# Altium PCB simple.PcbDoc (part 1 of 2)
Units mil, origin at the board's own origin, x right, y up, seen from the top; angles counter-clockwise.
Board outline 3675.59 x 3445.28 mil, 2 copper layers (Top Layer, Bottom Layer); 234 components, 188 nets, 815 pads, 280 vias.
Unrouted connection lines stored in the file: 1.
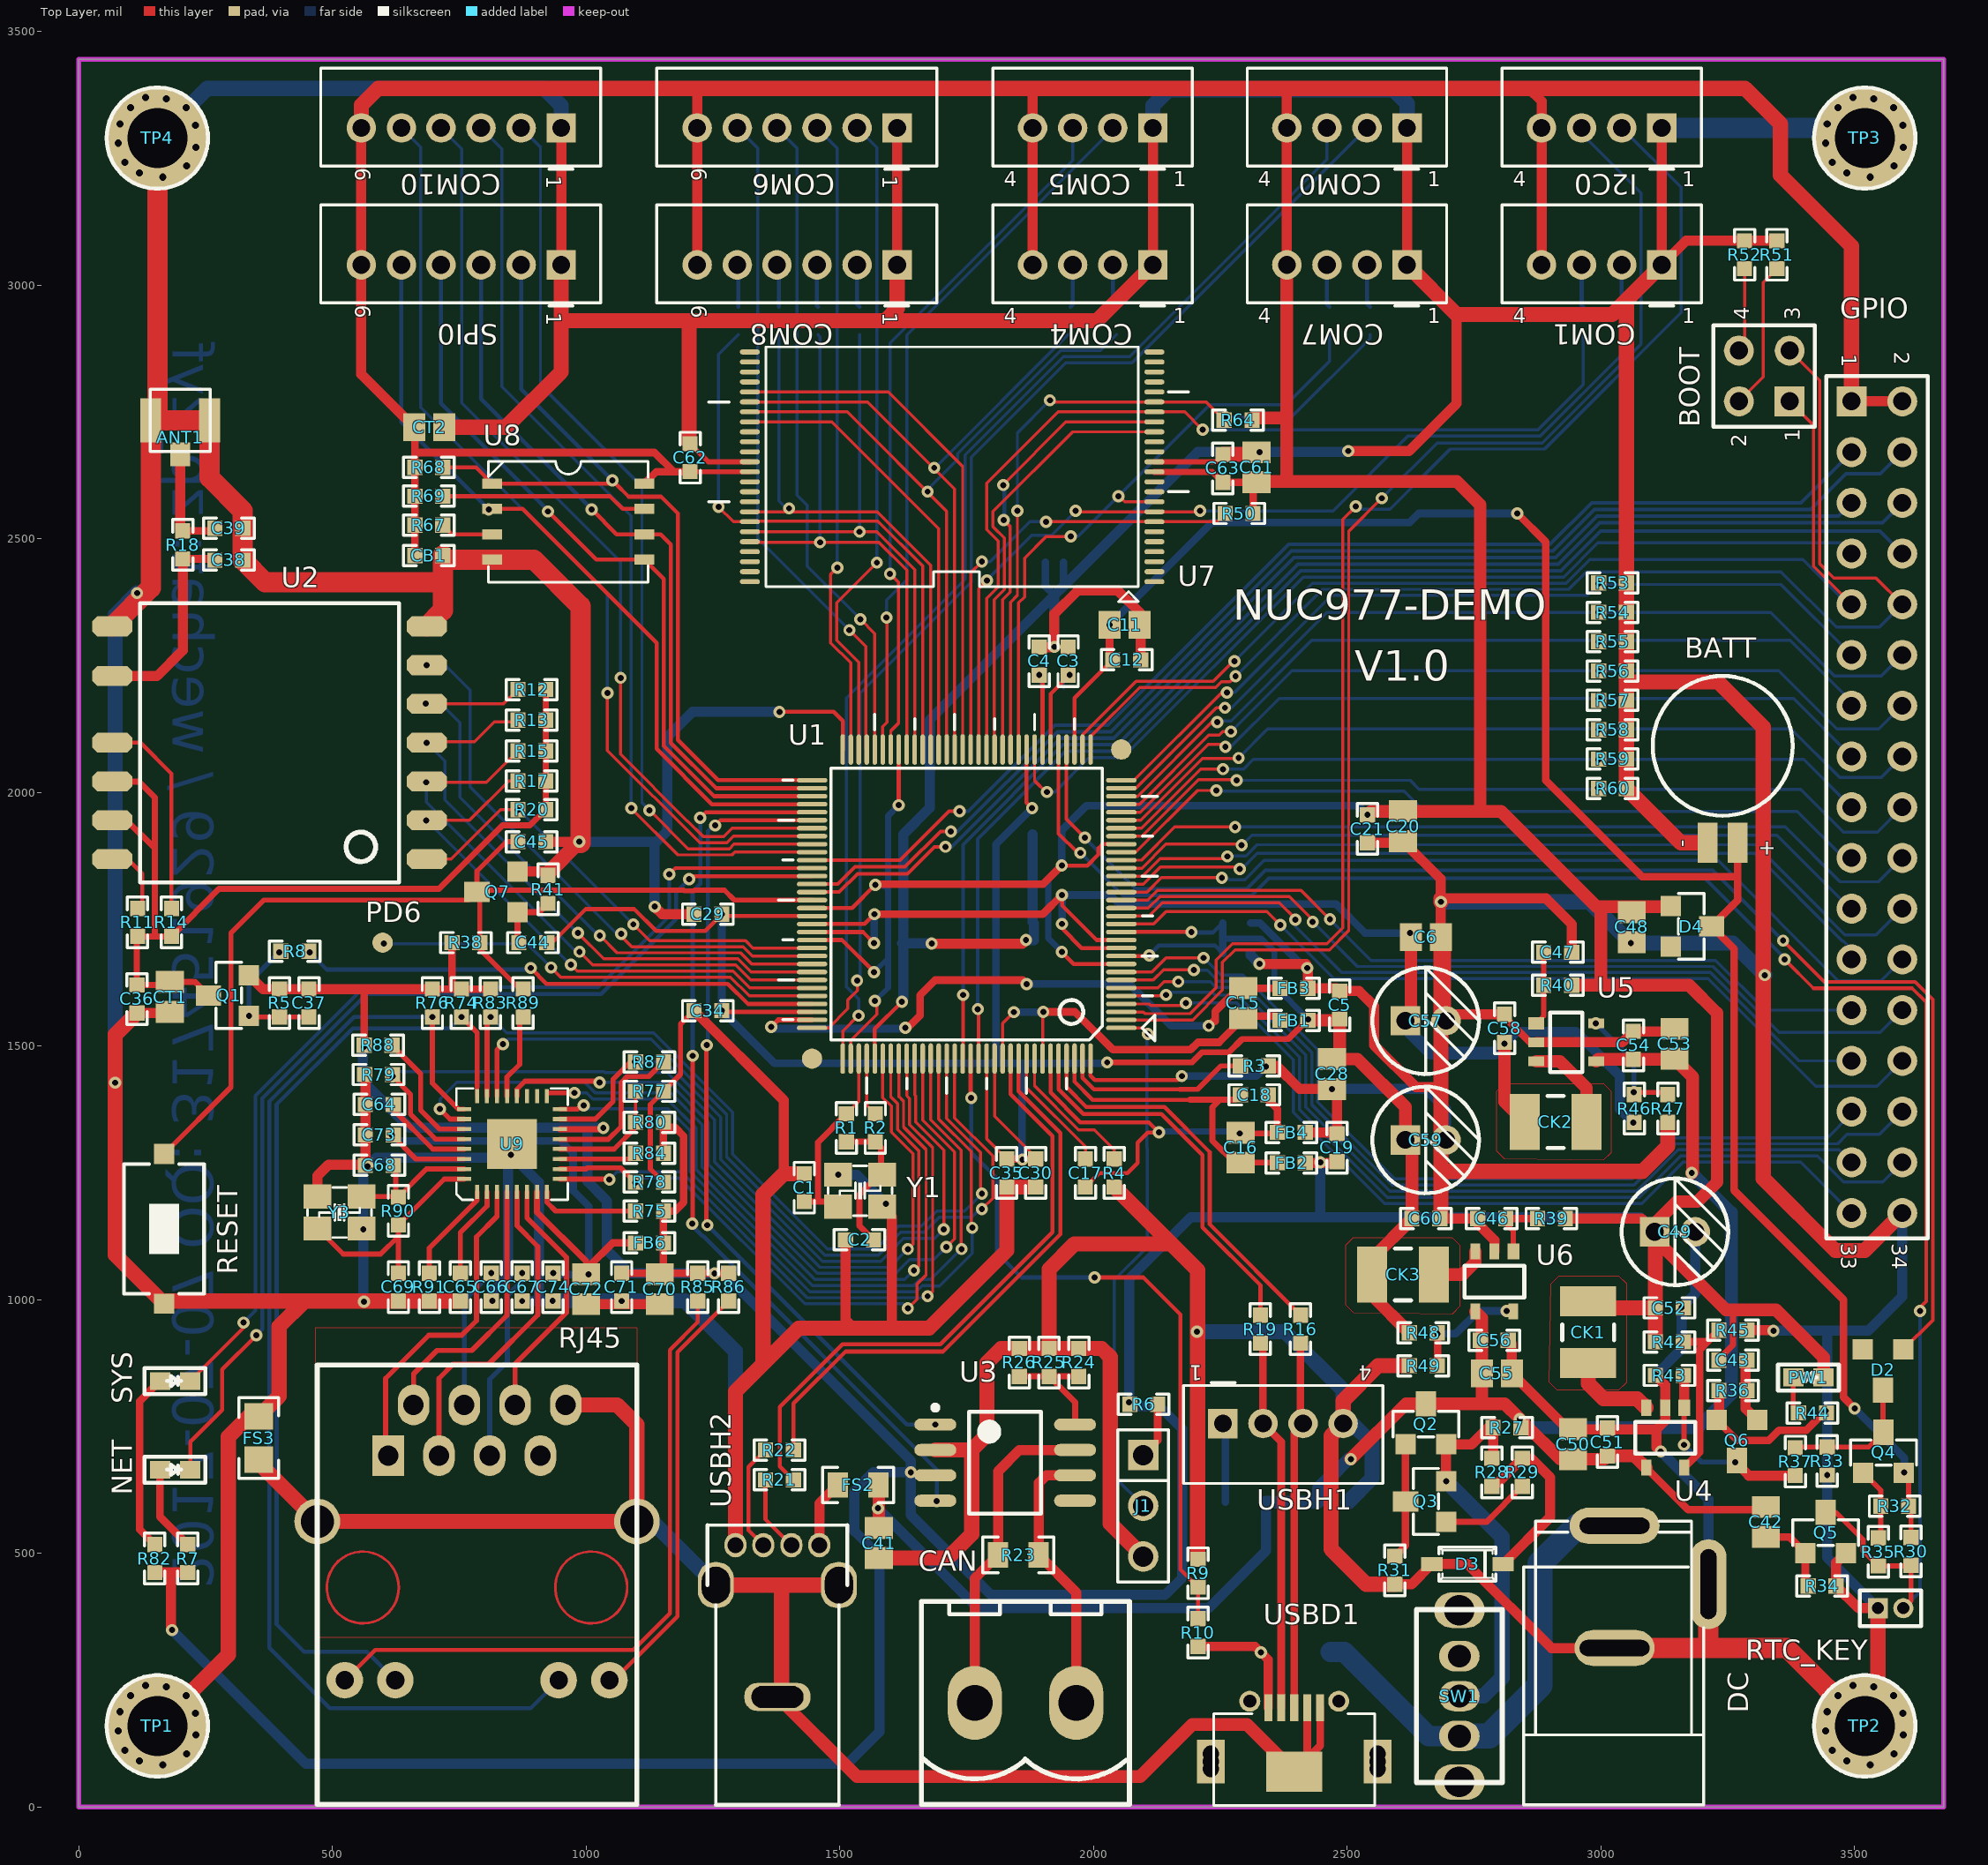
[diagram p0: Top Layer view]
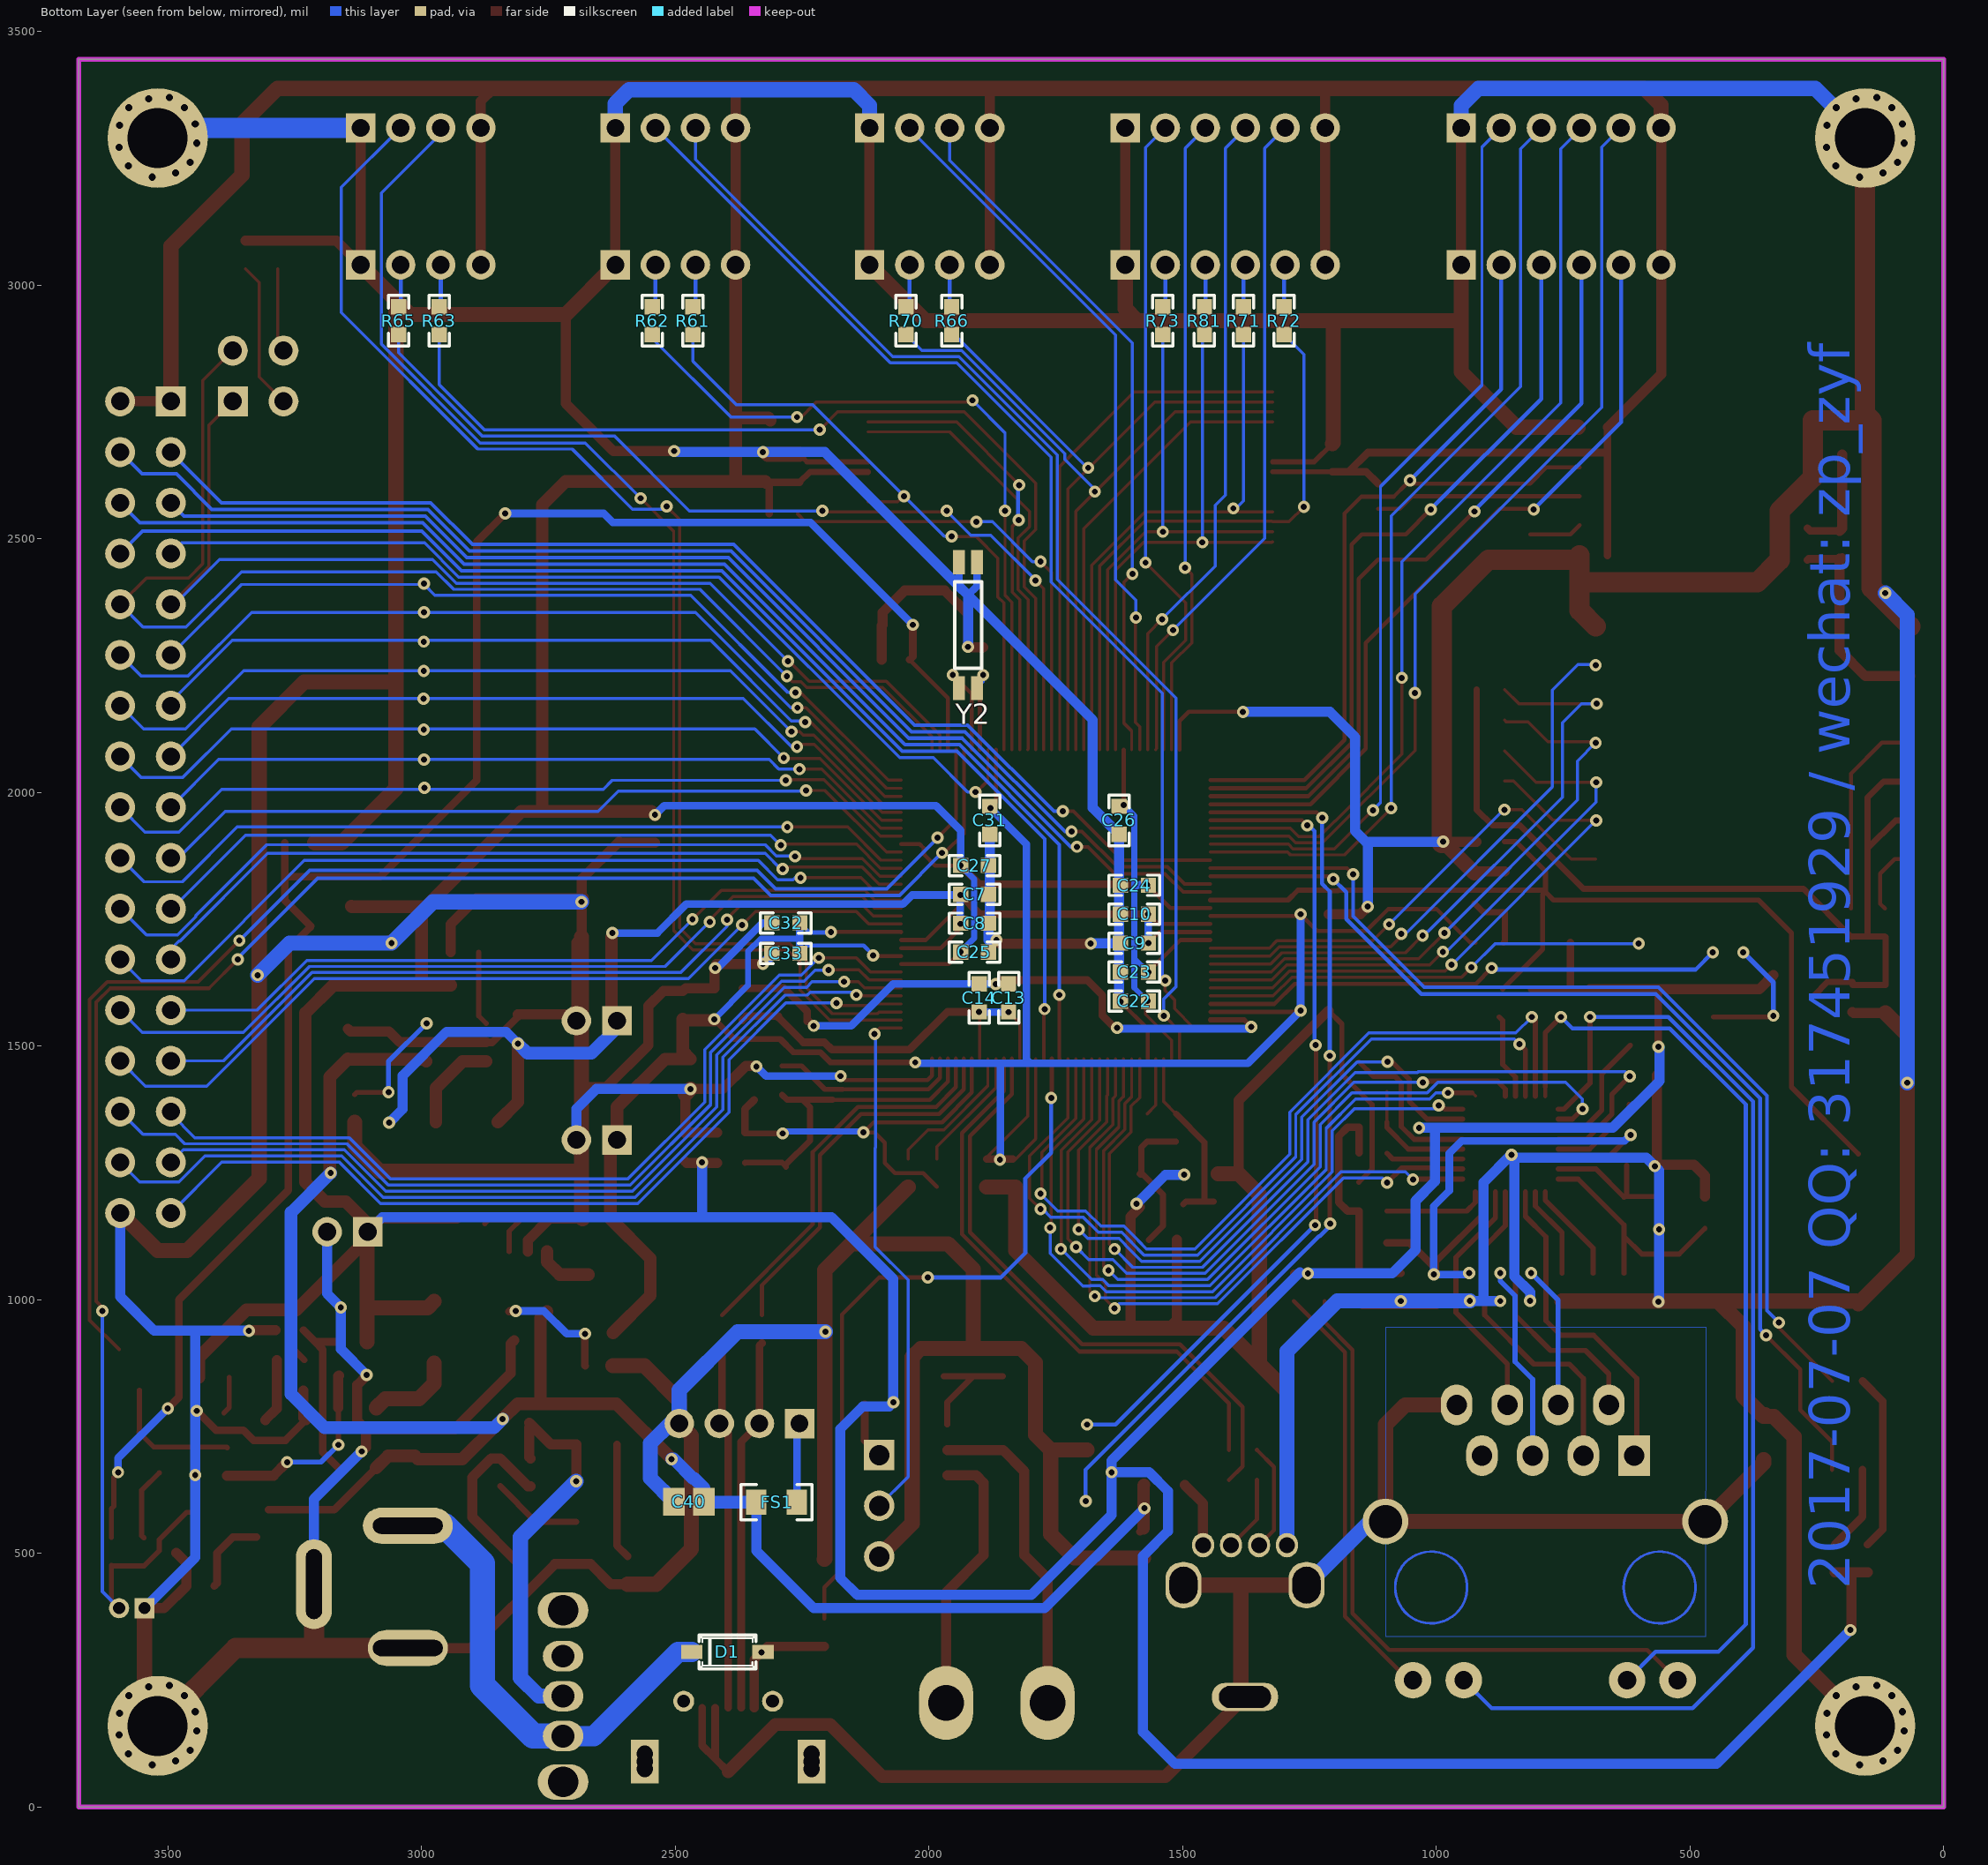
[diagram p1: Bottom Layer view, seen from below]

## Layer stack, top to bottom
Top Solder: solder mask 0.4, Solder Resist, Dk 3.5
Top Layer: signal copper 1.4
Dielectric 1: dielectric 12.6, FR-4, Dk 4.8
Bottom Layer: signal copper 1.4
Bottom Solder: solder mask 0.4, Solder Resist, Dk 3.5

## Board outline
0,0 0,3445.28 3675.59,3445.28 3675.59,0

## Design rules (kind name [scope] priority, off if disabled: settings)
Clearance [All] p1: gap=6
PolygonConnect [All] p1: connectstyle=Relief reliefconductorwidth=10 reliefentries=4 polygonreliefangle="90 Angle" airgapwidth=10
RoutingVias [All] p1: holewidth=12 width=24 viastyle="Through Hole" minholewidth=12 minwidth=24 maxholewidth=28 maxwidth=50
SolderMaskExpansion [All] p1: expansion=4
Width [All] p1: maxlimit=50 minlimit=6 preferedwidth=8
30 further rules are at their usual default settings.

## Classes and differential pairs
component class configure: BOOT R51 R52 R53 R54 R55 R56 R57 R58 R59 R60
component class flash: C61 C62 C63 CB1 CT2 R50 R64 R67 R68 R69 U7 U8
component class interface: ANT1 C36 C37 C38 C39 C40 C41 CAN COM0 COM1 COM4 COM5 COM6 COM7 COM8 COM10 CT1 D1 FS1 FS2 FS3 I2C0 J1 PD6 Q1 R5 R6 R8 R9 R10 R11 R12 R13 R14 R15 R16 R17 R18 R19 R20 R21 R22 R23 R24 R25 R26 SPI0 TP1 TP2 TP3 TP4 U2 U3 USBD1 USBH1 USBH2
component class nuc977: C1 C2 C3 C4 C5 C6 C7 C8 C9 C10 C11 C12 C13 C14 C15 C16 C17 C18 C19 C20 C21 C22 C23 C24 C25 C26 C27 C28 C29 C30 C31 C32 C33 C34 C35 FB1 FB2 FB3 FB4 GPIO NET R1 R2 R3 R4 R7 R61 R62 R63 R65 R66 R70 R71 R72 R73 R81 R82 SYS U1 Y1 Y2
component class power: BATT C42 C43 C44 C45 C46 C47 C48 C49 C50 C51 C52 C53 C54 C55 C56 C57 C58 C59 C60 CK1 CK2 CK3 D2 D3 D4 DC PW1 Q2 Q3 Q4 Q5 Q6 Q7 R27 R28 R29 R30 R31 R32 R33 R34 R35 R36 R37 R38 R39 R40 R41 R42 R43 R44 R45 R46 R47 R48 R49 RESET RTC_KEY SW1 U4 U5 U6
component class RMII: C64 C65 C66 C67 C68 C69 C70 C71 C72 C73 C74 FB6 R74 R75 R76 R77 R78 R79 R80 R83 R84 R85 R86 R87 R88 R89 R90 R91 RJ45 U9 Y3
net class PA[0..9]: PA0 PA1 PA2 PA3 PA4 PA5 PA6 PA7 PA8 PA9 PA10 PA11 PA12 PA13 PA14 PA15
net class PB[6..9]: PB0 PB1 PB2 PB3 PB4 PB5 PB6 PB7 PB8 PB9 PB10 PB11 PB12 PB13 PB14 PB15
net class PI[1..15]: PI1 PI2 PI3 PI4 PI5 PI6 PI7 PI8 PI9 PI10 PI11 PI12 PI13 PI14 PI15
net class PD[0..7]: PD0 PD1 PD2 PD3 PD4 PD5 PD6 PD7

## Components (designator, comment, footprint, x,y, rotation, side; value= is the part's Value field where it differs from the comment)
ANT1 "IPEX-SOCKET/SMA" ANT_PIX 200,2700 r0 top
BATT "BATTERY" MS621 3240,1901 r270 top
BOOT "Header 2X2" HDR2X2 3372,2771 r90 top
C1 "27pF" 0603C 1430,1221 r90 top
C2 "27pF" 0603C 1539,1118 r180 top
C3 "27pF" 0603C 1950,2259 r90 top
C4 "27pF" 0603C 1893,2259 r90 top
C5 "104/SMD0603" 0603C 2485,1580.91 r90 top
C6 "22Uf/SMD0805" C0805 2655,1715 r0 top
C7 "104/SMD0603" 0603C 1910,1799 r180 bottom
C8 "104/SMD0603" 0603C 1910,1742.25 r180 bottom
C9 "104/SMD0603" 0603C 1595,1703 r0 bottom
C10 "104/SMD0603" 0603C 1595,1760 r0 bottom
C11 "10uF/SMD0805" C0805 2061.31,2330.5 r0 top
C12 "104/SMD0603" 0603C 2065.4,2261.5 r0 top
C13 "104/SMD0603" 0603C 1842.87,1595 r90 bottom
C14 "104/SMD0603" 0603C 1901,1595 r90 bottom
C15 "22Uf/SMD0805" C0805 2295,1585 r90 top
C16 "22uF/SMD1206" C0805 2290,1300 r90 top
C17 "104/SMD0603" 0603C 1984,1250 r270 top
C18 "104/SMD0603" 0603C 2317,1404 r0 top
C19 "104/SMD0603" 0603C 2480,1300 r90 top
C20 "22Uf/SMD0805" C0805 2610,1933.31 r270 top
C21 "102/SMD0603" 0603C 2540,1928.31 r270 top
C22 "104/SMD0603" 0603C 1595,1589 r0 bottom
C23 "104/SMD0603" 0603C 1595,1646 r0 bottom
C24 "104/SMD0603" 0603C 1595,1817 r0 bottom
C25 "104/SMD0603" 0603C 1910,1685.5 r180 bottom
C26 "104/SMD0603" 0603C 1625,1945 r270 bottom
C27 "104/SMD0603" 0603C 1910,1856 r180 bottom
C28 "22Uf/SMD0805" C0805 2470,1445 r270 top
C29 "104/SMD0603" 0603C 1240,1760 r180 top
C30 "104/SMD0603" 0603C 1886,1250 r270 top
C31 "104/SMD0603" 0603C 1880,1945 r270 bottom
C32 "104/SMD0603" 0603C 2282,1743 r0 bottom
C33 "104/SMD0603" 0603C 2282,1683 r0 bottom
C34 "104/SMD0603" 0603C 1240,1570 r180 top
C35 "104/SMD0603" 0603C 1829,1250 r270 top
C36 "104/SMD0603" 0603C 114.68,1592.91 r90 top
C37 "104/SMD0603" 0603C 453.68,1585 r90 top
C38 "NC" 0603C 296,2458 r180 top
C39 "NC" 0603C 296,2521 r180 top
C40 "22uF/SMD1206" C0805 2473,602 r0 bottom
C41 "22uF/SMD1206" C0805 1577,520.47 r90 top
C42 "1uF/SMD0805" C0805 3325,562 r270 top
C43 "104/SMD0603" 0603C 3260,881 r0 top
C44 "1uF" 0603C 895,1704 r180 top
C45 "1uF" 0603C 893,1903 r0 top
C46 "103/SMD0603" 0603C 2785,1160 r0 top
C47 "103/SMD0603" 0603C 2915,1685 r180 top
C48 "10uF/SMD0805" C0805 3061,1734.53 r270 top
C49 "FP-6R3RE271M-F8" 6R3RE271M 3146,1134 r90 top
C50 "10uF/SMD0805" C0805 2945,715.34 r90 top
C51 "104/SMD0603" 0603C 3013,719.5 r270 top
C52 "104/SMD0603" 0603C 3135,984 r180 top
C53 "10uF/SMD0805" C0805 3145,1504.53 r90 top
C54 "104/SMD0603" 0603C 3064,1501.53 r270 top
C55 "10uF/SMD0805" C0805 2795,855 r0 top
C56 "104/SMD0603" 0603C 2790,920 r180 top
C57 "FP-6R3RE271M-F8" 6R3RE271M 2654.69,1550 r90 top
C58 "104" 0603C 2810,1535 r270 top
C59 "FP-6R3RE271M-F8" 6R3RE271M 2654.69,1315 r90 top
C60 "104" 0603C 2655,1160 r180 top
C61 "10uF" C0805 2321.32,2641 r270 top
C62 "104/SMD0603" 0603C 1205,2660 r270 top
C63 "104/SMD0603" 0603C 2255,2639 r270 top
C64 "105/SMD0603" 0603C 592.5,1385 r180 top
C65 "105/SMD0603" 0603C 752,1025 r270 top
C66 "222/SMD0603" 0603C 813,1025 r270 top
C67 "222/SMD0603" 0603C 874,1025 r270 top
C68 "27pF" 0603C 592.5,1265 r0 top
C69 "27pF" 0603C 630,1025 r90 top
C70 "10uF/SMD0805" C0805 1145,1020.91 r270 top
C71 "104/SMD0603" 0603C 1070,1025 r270 top
C72 "10uF/SMD0805" C0805 1000,1020.91 r270 top
C73 "104/SMD0603" 0603C 592.5,1325 r180 top
C74 "104/SMD0603" 0603C 935,1025 r270 top
CAN "CON2" INTERFACE-2 1866,205.51 r180 top
CB1 "0.1uF" 0603C 690,2467 r180 top
CK1 "2.2uH/1.85A/SWPA4020S2R2NT" C1210_M 2975,936 r90 top
CK2 "2.2uH/CD42-2R2M" C1210_M 2910.69,1350.53 r180 top
CK3 "2.2uH/CD42-2R2M" C1210_M 2610,1050 r180 top
COM0 "Header 4" PH04S_180 2499.5,3310 r270 top
COM1 "Header 4" PH04S_180 3001.5,3040 r270 top
COM4 "Header 4" PH04S_180 1998.5,3040 r270 top
COM5 "Header 4" PH04S_180 1998.5,3310 r270 top
COM6 "Header 6H" PH06S 1416,3310 r270 top
COM7 "Header 4" PH04S_180 2499.5,3040 r270 top
COM8 "Header 6H" PH06S 1416,3040 r270 top
COM10 "Header 6H" PH06S 754,3310 r270 top
CT1 "10uF" C0805 179.68,1597 r90 top
CT2 "10uF" C0805 691,2720 r0 top
D1 "1N5819S" SOD-123_1N5819HW 2397,306 r180 bottom
D2 "HBAT54/SOT-23" SOT-23_HBAT54 3556,877 r0 top
D3 "5.1V" SOD-123_1N5819HW 2737,479 r180 top
D4 "BAT54" BAT54 3178,1736 r270 top
DC "DC-10B" DC-JACK 3026,313.59 r270 top
FB1 "150R/800mA/SMD0603" 0603R 2395,1550.91 r0 top
FB2 "150R/800mA/SMD0603" 0603R 2390,1270 r180 top
FB3 "150R/800mA/SMD0603" 0603R 2395,1614.09 r0 top
FB4 "150R/800mA/SMD0603" 0603R 2390,1330 r180 top
FB6 "150R/800mA/SMD0603" 0603R 1125,1112 r0 top
FS1 "500mA" 0805 2300,601 r90 bottom
FS2 "500mA" 0805 1536,635 r270 top
FS3 "500mA" 0805R 355,770 r270 top
GPIO "Header 17X2" HDR2X17 3494,2771 r270 top
I2C0 "Header 4" PH04S_180 3001.5,3310 r270 top
J1 "Device / HOST" SIP3 2098,694 r270 top
NET "blue" LED-0603 190,665 r180 top
PD6 "TP" TP 598.88,1703.64 r90 top
PW1 "red" LED-0603 3409,847 r0 top
Q1 "AP2305N/SOT-23" AP2305N_SOT23 295.68,1600 r90 top
Q2 "AP2305N/SOT-23" AP2305N_SOT23 2655,755 r0 top
Q3 "AP2305N/SOT-23" AP2305N_SOT23 2655,602.5 r90 top
Q4 "HMBT3906/SOT-23" SOT-23_HMBT3906 3557,699 r180 top
Q5 "2N7002/SOT-23" SOT-23_H2N7002 3443,541 r0 top
Q6 "HMBT3904/SOT-23" SOT-23_HMBT3904 3268,723 r0 top
Q7 "HMBT3904/SOT-23" SOT-23_HMBT3904 825,1804 r270 top
R1 "1M" 0603R 1513,1339 r90 top
R2 "390R" 0603R 1570,1339 r270 top
R3 "12.1K" 0603R 2317,1461 r180 top
R4 "12.1K" 0603R 2041,1250 r90 top
R5 "100K" 0603R 395.68,1585 r270 top
R6 "51K" 0603R 2099,794 r0 top
R7 "2K" 0603C 215,490 r90 top
R8 "10K" 0603R 426,1687 r180 top
R9 "390K" 0603R 2206,461 r90 top
R10 "200K" 0603R 2206,344 r270 top
R11 "10K" 0603R 116,1744 r270 top
R12 "10K" 0603R 893,2203 r180 top
R13 "10K" 0603R 893,2142.5 r180 top
R14 "10K" 0603R 183,1744 r270 top
R15 "10K" 0603R 893,2082 r180 top
R16 "33R/SMD0603" 0603R 2408,942 r270 top
R17 "10K" 0603R 893,2022.5 r180 top
R18 "0R" 0603R 205,2488 r90 top
R19 "33R/SMD0603" 0603R 2329,942 r270 top
R20 "10K" 0603R 893,1966 r180 top
R21 "33R/SMD0603" 0603R 1381,645 r180 top
R22 "33R/SMD0603" 0603R 1381,704 r180 top
R23 "120R" 0805 1852,497 r270 top
R24 "0R" 0603R 1971,876.5 r90 top
R25 "10K" 0603R 1912.5,876.5 r90 top
R26 "100K" 0603R 1854,876.5 r90 top
R27 "0R" 0603C 2815,748 r0 top
R28 "15K" 0603C 2785,660 r270 top
R29 "4K7" 0603C 2845,660 r270 top
R30 "100K/SMD0603" 0603R 3611,504 r90 top
R31 "10K" 0603C 2594,467 r270 top
R32 "100K/SMD0603" 0603R 3579,593 r0 top
R33 "100K/SMD0603" 0603R 3446,682 r270 top
R34 "470K/SMD0603" 0603R 3436,436 r180 top
R35 "47K/SMD0603" 0603R 3547,503 r270 top
R36 "100K/SMD0603" 0603R 3260,821 r180 top
R37 "47K/SMD0603" 0603R 3383,681 r270 top
R38 "100K" 0603R 763,1704 r180 top
R39 "10K/SMD0603" 0603R 2902.5,1160 r0 top
R40 "1K/SMD0603" 0603R 2915,1620 r0 top
R41 "100K" 0603R 925,1809 r270 top
R42 "100K/1%/SMD0603" 0603R 3135,917 r180 top
R43 "ASK/47K/SMD0603" 0603R 3135,851 r180 top
R44 "2K" 0603R 3417,777 r0 top
R45 "22K/1%/SMD0603" 0603R 3260,940 r180 top
R46 "240K" 0603R 3065.69,1377.03 r90 top
R47 "120K" 0603R 3131.69,1377.03 r270 top
R48 "100K" 0603R 2650,935 r0 top
R49 "100K" 0603R 2650,870 r180 top
R50 "10K/SMD0603" 0603R 2287,2550 r0 top
R51 "10K" 0603R 3347,3060 r270 top
R52 "10K" 0603R 3283,3060 r270 top
R53 "10K" 0603R 3023,2413 r180 top
R54 "10K" 0603R 3023,2355.14 r180 top
R55 "10K" 0603R 3023,2297.29 r180 top
R56 "10K" 0603R 3023,2239.43 r180 top
R57 "10K" 0603R 3023,2181.57 r180 top
R58 "10K" 0603R 3023,2123.71 r180 top
R59 "10K" 0603R 3023,2065.86 r180 top
R60 "10K" 0603R 3023,2008 r180 top
R61 "22R" 0603R 2465,2930 r270 bottom
R62 "22R" 0603R 2545,2930 r270 bottom
R63 "22R" 0603R 2965,2930 r270 bottom
R64 "10K/SMD0603" 0603R 2285,2734 r0 top
R65 "22R" 0603R 3045,2930 r270 bottom
R66 "22R" 0603R 1955,2930 r270 bottom
R67 "10K" 0603R 690,2527 r0 top
R68 "10K" 0603R 690,2641 r0 top
R69 "10K" 0603R 690,2584 r0 top
R70 "22R" 0603R 2045,2930 r270 bottom
R71 "22R" 0603R 1380,2930 r270 bottom
R72 "22R" 0603R 1300,2930 r270 bottom
R73 "22R" 0603R 1539,2930 r270 bottom
R74 "4.7K/SMD0603" 0603R 754.33,1585 r270 top
R75 "4.7K/SMD0603" 0603R 1125,1175 r180 top
R76 "4.7K/SMD0603" 0603R 697,1585 r270 top
R77 "DNP/4.7K/SMD0603" 0603R 1125,1411 r180 top
R78 "4.7K/SMD0603" 0603R 1125,1232 r180 top
R79 "4.7K/SMD0603" 0603R 591,1444 r0 top
R80 "DNP/4.7K/SMD0603" 0603R 1125,1350 r180 top
R81 "22R" 0603R 1457,2930 r270 bottom
R82 "2K" 0603C 150,490 r90 top
R83 "4.7K/SMD0603" 0603R 811.67,1585 r270 top
R84 "4.7K/SMD0603" 0603R 1125,1289 r180 top
R85 "510R/SMD0603" 0603R 1220,1025 r90 top
R86 "510R/SMD0603" 0603R 1281,1025 r90 top
R87 "0R" 0603R 1125,1469 r180 top
R88 "10K" 0603C 590,1502 r0 top
R89 "0R" 0603R 876,1585 r90 top
R90 "1M" 0603C 630,1175 r270 top
R91 "2.49K/1%/SMD0603" 0603R 691,1025 r270 top
RESET "SW" SW-PB2 168,1140 r90 top
RJ45 "HR911105A" HR911105A 769,263.91 r270 top
RTC_KEY "JP2" mhdr1x2 3546,392 r0 top
SPI0 "Header 6H" PH06S 754,3040 r270 top
SW1 "" SS-12D07 2721,218.8 r180 top
SYS "blue" LED-0603 190,840 r180 top
TP1 "TEST POINT" HOLE53 155,160 r0 top
TP2 "TEST POINT" HOLE53 3520,160 r0 top
TP3 "TEST POINT" HOLE53 3520,3290 r0 top
TP4 "TEST POINT" HOLE53 155,3290 r0 top
U1 "NUC977" QFP128/16/0.4 1750,1780 r90 top
U2 "RTL8189ES" RTL8189ES 631,2372.73 r180 top
U3 "SN65HVD230" SOIC127P800-8N 1826,679 r0 top
U4 "LC3406CB5TR/SOT23-5" SOT-23-5 3164,787.11 r0 top
U5 "LC3406CB5TR/SOT23-5" SOT-23-5 2872.69,1544.93 r90 top
U6 "LC3406CB5TR/SOT23-5" SOT-23-5 2827.4,1095 r0 top
U7 "S34ML02G100TFI000/TSOP1-48" TSOP48-0.5MM 2127.87,2415.57 r180 top
U8 "W55X16" VDFPN8 965,2534 r0 top
U9 "RTL8201F/QFN-32" QFN32 854,1307 r90 top
USBD1 "usb device" USB-MICRO-AB 2395.63,195.92 r90 top
USBH1 "Header 4" PH04S_180 2373.5,756 r90 top
USBH2 "USB_A_VerticalType" "USB/A 90" 1255.74,437.58 r0 top
Y1 "12Mhz" HCX-3SB3225 1540,1215 r0 top
Y2 "32K768Hz" 32K768HZ 1923,2330 r270 bottom
Y3 "25M" HCX-3SB3225 514,1172 r0 top

## Footprints (in the part's own frame and the unit in brackets; to place one, negate y for a bottom-side part, rotate by r counter-clockwise, add the part's x,y. Pads: shape width x height; smd on the part's side, far side on the other; paste and mask are expansions set on the pad)
6R3RE271M [mil]
  rect 58x58 / inner round 0 / far side rect 58x58 hole 35 mask+10: 1(0,40)
  round 58 / inner round 0 / far side round 58 hole 35 mask+10: 2(0,-40)
  silkscreen extent -105,-105 105,105
32K768HZ [mm]
  rect 1.2x0.6 smd: 1(3.15,0.45) 2(-3.15,0.45) 3(-3.15,-0.45) 4(3.15,-0.45)
  silkscreen extent -2.16,-0.66 2.16,0.69
0603C [mil]
  rect 30x30 smd: 1(27.5,0) 2(-27.5,0)
  silkscreen extent -50,-20 50,20
0603R [mil]
  rect 30x30 smd: 1(27.5,0) 2(-27.5,0)
  silkscreen extent -50,-20 50,20
0805 [mil]
  rect 50x40 smd: 1(0,40) 2(0,-40)
  silkscreen extent -35,-70 35,70
0805R [mil]
  rect 52x56 smd: 1(0,0) 2(85,0)
  silkscreen extent -37,-39 122,39
ANT_PIX [mil]
  rect 39.37x47.23 smd mask+3.93: 1(0,-33.47)
  rect 41.33x86.6 smd mask+3.93: 2(58.07,33.47) 3(-58.07,33.47)
  silkscreen extent -59,-28 59,94
AP2305N_SOT23 [mil]
  rect 40x50 smd: D(0,40)
  rect 40x40 smd: G(-40,-40) S(40,-40)
  silkscreen extent -65,-25 65,25
BAT54 [mil]
  rect 40x40 smd: 1(-40,-40) 2(40,-40)
  rect 40x50 smd: 3(0,40)
  silkscreen extent -65,-25 65,25
C0805 [mm] "Chip Capacitor, Body 2.0x1.3mm, IPC High Density"
  rect 1.1x1.4 smd: 1(-0.75,0) 2(0.75,0)
  body extent -1.1,-0.72 1.1,0.72, height 1.4
C1210_M [mm] "Chip Capacitor, Body 3.2x2.5mm, IPC Low Density"
  rect 1.5x2.8 smd: 1(-1.55,0) 2(1.55,0)
  silkscreen extent -0.4,-1.3 0.4,1.3, body extent -1.7,-1.35 1.7,1.35, height 1.5
DC-JACK [mm]
  oval 1.8x4.5 hole 0.8 slot 3.5 at 90 deg mask+0.151: 1(-6.121,0.025)
  oval 1.8x4 hole 0.8 slot 3.5 at 90 deg mask+0.151: 2(0,0.025)
  oval 4.5x1.8 hole 0.8 slot 3.5 at 0 deg mask+0.151: 3(-3.2,4.724)
  silkscreen extent -6.35,-4.53 7.85,4.47
HCX-3SB3225 [mm]
  rect 1.4x1.2 smd: 1(1.1,0.8) 2(-1.1,0.8) 3(-1.1,-0.8) 4(1.1,-0.8)
  silkscreen extent -1.6,-1.25 1.6,1.25
HDR2X2 [mm] "Connector; Header; 2x2 Position"
  rect 1.5x1.5 hole 0.9: 1(0,0)
  round 1.5 hole 0.9: 2(0,2.54) 3(2.54,0) 4(2.54,2.54)
  silkscreen extent -1.27,-1.27 3.81,3.81
HDR2X17 [mm] "Connector; Header; 17x2 Position"
  rect 1.5x1.5 hole 0.9: 1(0,0)
  round 1.5 hole 0.9: 2(0,2.54) 3(2.54,0) 4(2.54,2.54) 5(5.08,0) 6(5.08,2.54) 7(7.62,0) 8(7.62,2.54) 9(10.16,0) 10(10.16,2.54) 11(12.7,0) 12(12.7,2.54) 13(15.24,0) 14(15.24,2.54) 15(17.78,0) 16(17.78,2.54) 17(20.32,0) 18(20.32,2.54) 19(22.86,0) 20(22.86,2.54) 21(25.4,0) 22(25.4,2.54) 23(27.94,0) 24(27.94,2.54) 25(30.48,0) 26(30.48,2.54) 27(33.02,0) 28(33.02,2.54) 29(35.56,0) 30(35.56,2.54) 31(38.1,0) 32(38.1,2.54) 33(40.64,0) 34(40.64,2.54)
  silkscreen extent -1.27,-1.27 41.91,3.81
HOLE53 [mm]
  round 5 hole 3: 1(0,0)
  silkscreen extent -2.54,-2.54 2.54,2.54
HR911105A [mil] "HR911105A"
  rect 80x62 hole 40: 1(-429,-159)
  oval 80x62 hole 40: 2(-529,-109) 3(-429,-59) 4(-529,-9) 5(-429,41) 6(-529,91) 7(-429,141) 8(-529,191)
  round 72 hole 36: 9(13.91,-244.63) 10(13.91,-145) 11(13.91,176.87) 12(13.91,277)
  round 90 hole 65: 13(-299.08,331.16) 13(-299.08,-298.76)
  Multi-Layer circle w5: c-169,241 r70.8
  Multi-Layer circle w5: c-169,-209 r70.8
  silkscreen extent -608,-299 258,331
INTERFACE-2 [mm]
  oval 2.7x3.7 hole 1.8: 1(-2.54,0) 2(2.54,0)
  silkscreen extent -5.21,-5.08 5.21,5.08
LED-0603 [mil]
  rect 40x35 smd: 1(29.92,0) 2(-29.92,0)
  silkscreen extent -60,-26 60,26
mhdr1x2 [mm] "Connector; Header; 2 Position"
  rect 1x1 hole 0.6: 1(0,0)
  round 1 hole 0.6: 2(1.27,0)
  silkscreen extent -0.9,-0.9 2.17,0.9
MS621 [mil] "VBAT?"
  rect 78.73x39.37 smd: 1(0,29.53) 2(0,-29.53)
  silkscreen extent -329,-138 -53,138
PH04S_180 [mil]
  rect 58x58 / inner round 60 / far side rect 58x58 hole 35 mask+10: 1(0,118.5)
  round 58 / inner round 60 / far side round 58 hole 35 mask+10: 2(0,39.5) 3(0,-39.5) 4(0,-118.5)
  silkscreen extent -118,-197 81,196
PH06S [mil]
  rect 58x58 / inner round 60 / far side rect 58x58 hole 35: 1(0,197)
  round 58 / inner round 60 / far side round 58 hole 35: 2(0,118) 3(0,39) 4(0,-40) 5(0,-118) 6(0,-197)
  silkscreen extent -118,-277 81,275
QFN32 [mm]
  rect 0.7x0.2 smd: 1(-2.4,1.75) 2(-2.4,1.25) 3(-2.4,0.75) 4(-2.4,0.25) 5(-2.4,-0.25) 6(-2.4,-0.75) 7(-2.4,-1.25) 8(-2.4,-1.75) 17(2.4,-1.75) 18(2.4,-1.25) 19(2.4,-0.75) 20(2.4,-0.25) 21(2.4,0.25) 22(2.4,0.75) 23(2.4,1.25) 24(2.4,1.75)
  rect 0.2x0.7 smd: 9(-1.75,-2.4) 10(-1.25,-2.4) 11(-0.75,-2.4) 12(-0.25,-2.4) 13(0.25,-2.4) 14(0.75,-2.4) 15(1.25,-2.4) 16(1.75,-2.4) 25(1.75,2.4) 26(1.25,2.4) 27(0.75,2.4) 28(0.25,2.4) 29(-0.25,2.4) 30(-0.75,2.4) 31(-1.25,2.4) 32(-1.75,2.4)
  rect 2.5x2.5 smd: 33(0,0)
  silkscreen extent -2.79,-2.79 2.79,2.79
QFP128/16/0.4 [mil]
  oval 9x60 smd: 1(-244.09,-304.65) 2(-228.35,-304.65) 3(-212.6,-304.65) 4(-196.85,-304.65) 5(-181.1,-304.65) 6(-165.35,-304.65) 7(-149.61,-304.65) 8(-133.86,-304.65) 9(-118.11,-304.65) 10(-102.36,-304.65) 11(-86.61,-304.65) 12(-70.87,-304.65) 13(-55.12,-304.65) 14(-39.37,-304.65) 15(-23.62,-304.65) 16(-7.87,-304.65) 17(7.87,-304.65) 18(23.62,-304.65) 19(39.37,-304.65) 20(55.12,-304.65) 21(70.87,-304.65) 22(86.61,-304.65) 23(102.36,-304.65) 24(118.11,-304.65) 25(133.86,-304.65) 26(149.61,-304.65) 27(165.35,-304.65) 28(181.1,-304.65) 29(196.85,-304.65) 30(212.6,-304.65) 31(228.35,-304.65) 32(244.09,-304.65) 65(244.09,304.65) 66(228.35,304.65) 67(212.6,304.65) 68(196.85,304.65) 69(181.1,304.65) 70(165.35,304.65) 71(149.61,304.65) 72(133.86,304.65) 73(118.11,304.65) 74(102.36,304.65) 75(86.61,304.65) 76(70.87,304.65) 77(55.12,304.65) 78(39.37,304.65) 79(23.62,304.65) 80(7.87,304.65) 81(-7.87,304.65) 82(-23.62,304.65) 83(-39.37,304.65) 84(-55.12,304.65) 85(-70.87,304.65) 86(-86.61,304.65) 87(-102.36,304.65) 88(-118.11,304.65) 89(-133.86,304.65) 90(-149.61,304.65) 91(-165.35,304.65) 92(-181.1,304.65) 93(-196.85,304.65) 94(-212.6,304.65) 95(-228.35,304.65) 96(-244.09,304.65)
  oval 60x9 smd: 33(304.65,-244.09) 34(304.65,-228.35) 35(304.65,-212.6) 36(304.65,-196.85) 37(304.65,-181.1) 38(304.65,-165.35) 39(304.65,-149.61) 40(304.65,-133.86) 41(304.65,-118.11) 42(304.65,-102.36) 43(304.65,-86.61) 44(304.65,-70.87) 45(304.65,-55.12) 46(304.65,-39.37) 47(304.65,-23.62) 48(304.65,-7.87) 49(304.65,7.87) 50(304.65,23.62) 51(304.65,39.37) 52(304.65,55.12) 53(304.65,70.87) 54(304.65,86.61) 55(304.65,102.36) 56(304.65,118.11) 57(304.65,133.86) 58(304.65,149.61) 59(304.65,165.35) 60(304.65,181.1) 61(304.65,196.85) 62(304.65,212.6) 63(304.65,228.35) 64(304.65,244.09) 97(-304.65,244.09) 98(-304.65,228.35) 99(-304.65,212.6) 100(-304.65,196.85) 101(-304.65,181.1) 102(-304.65,165.35) 103(-304.65,149.61) 104(-304.65,133.86) 105(-304.65,118.11) 106(-304.65,102.36) 107(-304.65,86.61) 108(-304.65,70.87) 109(-304.65,55.12) 110(-304.65,39.37) 111(-304.65,23.62) 112(-304.65,7.87) 113(-304.65,-7.87) 114(-304.65,-23.62) 115(-304.65,-39.37) 116(-304.65,-55.12) 117(-304.65,-70.87) 118(-304.65,-86.61) 119(-304.65,-102.36) 120(-304.65,-118.11) 121(-304.65,-133.86) 122(-304.65,-149.61) 123(-304.65,-165.35) 124(-304.65,-181.1) 125(-304.65,-196.85) 126(-304.65,-212.6) 127(-304.65,-228.35) 128(-304.65,-244.09)
  round 40 smd: 129(304.65,-304.65) 131(-304.65,304.65)
  silkscreen extent -373,-376 374,371
RTL8189ES [mm] "WIFI"
  oct 2x1 smd: 1(-1.397,12.802) 2(-1.397,10.86) 3(-1.397,8.918) 4(-1.397,6.976) 5(-1.397,5.034) 6(-1.397,3.092) 7(-1.397,1.15) 8(14.351,1.15) 9(14.351,3.642) 10(14.351,6.976) 11(14.351,8.918) 12(14.351,10.86) 13(14.351,12.802)
  silkscreen extent 0,0 12.95,13.97
SIP3 [mil]
  rect 60x60 hole 40: 1(0,0)
  round 60 hole 40: 2(100,0) 3(200,0)
  silkscreen extent -50,-50 250,50
SOD-123_1N5819HW [mil]
  rect 42.47x27.53 smd: 1(-70.37,0) 2(70.37,0)
  silkscreen extent -56,-34 56,33
SOIC127P800-8N [mm]
  oval 2.1x0.6 smd: 1(-3.5,1.905) 2(-3.5,0.635) 3(-3.5,-0.635) 4(-3.5,-1.905) 5(3.5,-1.905) 6(3.5,-0.635) 7(3.5,0.635) 8(3.5,1.905)
  silkscreen extent -3.62,-2.55 1.8,2.88
SOT-23-5 [mm]
  rect 0.6x0.8 smd: 1(0,0)
  rect 0.5x0.8 smd: 2(-0.95,0) 3(-1.9,0) 4(-1.9,-3) 5(0,-3)
  silkscreen extent -2.45,-2.3 0.55,-0.7
SOT-23_H2N7002 [mil]
  rect 40x50 smd mask+10: D(0,40)
  rect 40x40 smd mask+10: G(-40,-40) S(40,-40)
  silkscreen extent -65,-25 65,25
SOT-23_HBAT54 [mil]
  rect 40x40 smd: 1(40,25) 2(-40,25)
  rect 40x50 smd: 3(0,-55)
SOT-23_HMBT3904 [mil]
  rect 40x40 smd: B(40,40) E(-40,40)
  rect 40x50 smd: C(0,-40)
SOT-23_HMBT3906 [mil]
  rect 40x40 smd mask+10: B(40,40) E(-40,40)
  rect 40x50 smd mask+10: C(0,-40)
  silkscreen extent -65,-25 65,25
SS-12D07 [mil] "波动开关"
  oval 100x70 hole 60: 0(0,169.29) 0(0,-169.29)
  oval 80x60 hole 45: 1(0,78.74) 2(0,0) 3(0,-78.74)
  silkscreen extent -85,-170 85,170
SW-PB2 [mm]
  rect 1x1 smd: 1(-3.756,-0.007) 2(3.744,-0.007)
  silkscreen extent -3.26,-2.01 3.24,1.99
TP [mil]
  round 40 smd: 1(0.36,-0.12)
TSOP48-0.5MM [mm]
  oval 1x0.25 smd: 1(0.2,0) 2(0.2,-0.5) 3(0.2,-1) 4(0.2,-1.5) 5(0.2,-2) 6(0.2,-2.5) 7(0.2,-3) 8(0.2,-3.5) 9(0.2,-4) 10(0.2,-4.5) 11(0.2,-5) 12(0.2,-5.5) 13(0.2,-6) 14(0.2,-6.5) 15(0.2,-7) 16(0.2,-7.5) 17(0.2,-8) 18(0.2,-8.5) 19(0.2,-9) 20(0.2,-9.5) 21(0.2,-10) 22(0.2,-10.5) 23(0.2,-11) 24(0.2,-11.5) 25(20.45,-11.5) 26(20.45,-11) 27(20.45,-10.5) 28(20.45,-10) 29(20.45,-9.5) 30(20.45,-9) 31(20.45,-8.5) 32(20.45,-8) 33(20.45,-7.5) 34(20.45,-7) 35(20.45,-6.5) 36(20.45,-6) 37(20.45,-5.5) 38(20.45,-5) 39(20.45,-4.5) 40(20.45,-4) 41(20.45,-3.5) 42(20.45,-3) 43(20.45,-2.5) 44(20.45,-2) 45(20.45,-1.5) 46(20.45,-1) 47(20.45,-0.5) 48(20.45,0)
  silkscreen extent -1.5,-11.75 22.5,1
USB-MICRO-AB [mm]
  round 1.4 hole 0.83: 0(-3.055,4.175) 0(-3.055,-4.175) 0(-2.7,-4.175) 0(-2.315,4.175) 0(-2.315,-4.175)
  rect 2.2x1.4 hole 0.83: 0(-2.7,4.175) 0(-2.7,-4.175)
  round 1.05 hole 0.65: 0(0.325,2.225) 0(0.325,-2.225)
  rect 1.35x0.4 smd: 1(0,1.3) 2(0,0.65) 3(0,0) 4(0,-0.65) 5(0,-1.3)
  rect 2x2.8 smd: 6(-3.2,0)
  silkscreen extent -4.9,-4.03 -0.3,4.03
"USB/A 90" [mm] "侧插短体无卷边"
  oval 1.1x1.219 hole 0.8: 1(5.18,2) 2(3.78,2) 3(2.38,2) 4(0.98,2)
  rrect90% 1.8x2.3 hole 1.4 slot 1.84 at 90 deg: D1(0,0) D2(6.16,0)
  rrect90% 3.3x1.4 hole 1.1 slot 2.6 at 0 deg: D3(3.08,-5.6)
  silkscreen extent -0.42,-11 6.58,3
VDFPN8 [mm]
  rect 1x0.5 smd: 1(-3.81,1.905) 2(-3.81,0.635) 3(-3.81,-0.635) 4(-3.81,-1.905) 5(3.81,-1.905) 6(3.81,-0.635) 7(3.81,0.635) 8(3.81,1.905)
  silkscreen extent -4,-3.04 4,3.01

## Part data
BOOT: "Header, 2-Pin, Dual row"
C1 C2 C3 C4 C58 C60 C68 C69: library part CAP, "Capacitor"
C5 C7 C8 C9 C10 C12 C13 C14 C17 C18 C19 C21 C22 C23 C24 C25 C26 C27 C29 C30 C31 C32 C33 C34 C35 C36 C37 C38 C39 C43 C46 C47 C51 C52 C54 C56 C62 C63 C64 C65 C66 C67 C71 C73 C74: library part C/SMD0603
C6 C15 C16 C20 C28 C40 C41 C53 C55: library part C/SMD1206
C11 C42 C48 C50 C70 C72: library part C/SMD0805
C44 C45 C61 CB1 CT1 CT2: library part "CAP NP_Dup1"
C49 C57 C59: library part "CAP POL"
CAN: "Connector"
CK1: library part "INDUCTOR IRON"
CK2 CK3: library part INDUCTOR1
COM0 COM1 COM4 COM5 COM7 I2C0 USBH1: "Header, 4-Pin"
COM6 COM8 COM10 SPI0: "Header, 6-Pin, Right Angle"
D1 D3: library part "Diode 10TQ035", "Schottky Rectifier"
DC: library part PJ202A
FB1 FB2 FB3 FB4 FB6: library part FB/SMD0603
FS1 FS2 R23 R88 R90: library part Res1, "Resistor"
FS3: library part Inductor, "Inductor"
GPIO: "Header, 17-Pin, Dual row"
J1: library part CON3
NET PW1 SYS: library part LED
Q5: library part 2N7002/SOT-23_Dup1
R1 R2 R3 R4 R7 R9 R10 R27 R28 R29 R31 R44 R46 R47 R48 R49 R82: library part res1, "Resistor"
R5 R6 R8 R11 R12 R13 R14 R15 R17 R18 R20 R24 R25 R26 R38 R41 R51 R52 R53 R54 R55 R56 R57 R58 R59 R60 R61 R62 R63 R65 R66 R67 R68 R69 R70 R71 R72 R73 R81: library part R_Dup1
R16 R19 R21 R22: library part R/SMD0603_Dup1
R30 R32 R33 R34 R35 R36 R37 R39 R40 R42 R43 R45 R50 R64 R74 R75 R76 R77 R78 R79 R80 R83 R84 R85 R86 R87 R89 R91: library part R/SMD0603
RESET: library part SW_PUSH
SW1: library part "SW SPDT"
TP1 TP2 TP3 TP4: library part "TEST POINT_Dup1"
U1: library part NUC977_7
U8: library part W55X10_2
USBD1: library part USB, "USB接口"
Y3: library part 12Mhz

## Via types
v1: diameter 24, hole 12, Top Layer to Bottom Layer, 232 vias
v2: diameter 25, hole 14, Top Layer to Bottom Layer, 48 vias

## Nets (pads, with @x,y where several pads share a name; then routed paths per layer and width w, separated by ;. In a path a pad name is that pad's centre, name@x,y a point inside that pad or via, vN(x,y) a via of type N, cw(c..) or ccw(c..) an arc to the next point about the centre after c; other vN are vias at no path point)
AVDD33: C72.1 C73.2 C74.2 FB6.2 U9.7 U9.30 | length 1171.1
  Top Layer w10: v1(617,1325) 664.53,1277.47 U9.30@759.51,1277.47
  Top Layer w12: U9.7@903.21,1212.51 903.21,1172.79 1000,1076 C72.1@1000,1050.44
  Top Layer w15: C72.1@1005,1065 1052,1112 FB6.2@1097.5,1112
  Bottom Layer w15: v1(617,1325) 629,1313 950,1313 974.38,1288.62 974.38,1215.38 1005,1184.77 v1(1005,1050) 937.5,1050 v1(935,1052.5)
CAN0H: CAN.2 R23.2 U3.7 | length 644.7
  Top Layer w20: CAN.2@1766,205.51 1766,451 R23.2@1812,497 1812,662 1854,704 U3.7@1963.8,704
CAN0L: CAN.1 R23.1 U3.6 | length 542.1
  Top Layer w20: U3.6@1963.8,654 1907,654 1892,639 R23.1@1892,497 1966,423 CAN.1@1966,205.51
CAN0RS: R24.2 R25.2 R26.2 U3.8 | length 233.2
  Top Layer w12: R26.2@1854,849 R25.2@1912.5,849 ; U3.8@1963.8,754 1963.8,797.7 R25.2@1912.5,849 ; R24.2@1971,849 R25.2@1912.5,849
CHASSIS: FS3.2 RJ45.8 RJ45.13 USBD1.4 USBD1.5 USBD1.6 USBH2.D1 USBH2.D2 USBH2.D3 | length 3233.2
  Top Layer w15: USBD1.6@2395.63,69.94 USBD1.6@2421.22,95.53 ; USBD1.4@2421.22,195.92 USBD1.6@2421.22,95.53 ; USBD1.5@2446.81,195.92 2446.81,121.12 USBD1.6@2421.22,95.53
  Top Layer w25: USBH2.D3@1377,217.11 1534.11,60 2092,60 2195,163 2302.57,163 USBD1.6@2395.63,69.94
  Top Layer w30: FS3.2@355,685 355,678.23 RJ45.13@470.24,562.99 RJ45.13@1100.16,562.99 1100.16,753.84 1061.09,792.91 RJ45.8@960,792.91 ; USBH2.D1@1255.74,437.58 1385,437.58 ; USBH2.D3@1377,217.11 1385,225.11 1385,437.58 ; USBH2.D2@1498.26,437.58 1385,437.58
  Bottom Layer w30: RJ45.13@1100.16,562.99 1130.33,562.99 USBH2.D1@1255.74,437.58
CLK_CTL: R77.1 R80.1 U9.12 | length 238.1
  Top Layer w6: R80.1@1097.5,1350 R77.1@1097.5,1411
  Top Layer w10: U9.12@948.49,1297.16 1055.16,1297.16 1097.5,1339.5 R80.1@1097.5,1350
CORE_VD12: C5.2 C28.1 C29.2 C30.2 C31.2 C32.2 C33.2 C34.2 C35.2 C44.2 C59.1 C60.1 CK3.2 FB1.1 R48.2 U1.10 U1.13 U1.41 U1.82 U1.94 U1.115 U1.116 | length 5135.1
  Top Layer w6: U1.115@1789.37,1475.35 1789.37,1317.13 C35.2@1829,1277.5 ; U1.116@1805.12,1475.35 1805.12,1361.88 1886,1281 C30.2@1886,1277.5
  Top Layer w8: C44.2@922.5,1704 933,1704 999,1770 1095,1770 1138,1727 1234.5,1727 v1(1267.5,1760) 1271.12,1756.38 U1.82@1445.35,1756.38 ; v1(1267.5,1570) 1270.1,1567.4 U1.94@1445.35,1567.4 ; U1.41@1868.11,2084.65 1868.11,1979.89 v1(1879,1969) ; U1.10@2054.65,1677.64 2108.64,1677.64 v1(2110,1679) ; U1.13@2054.65,1724.88 2054.76,1725 v1(2193,1725)
  Top Layer w12: v1(2027,1468) 2194,1468 2214,1488 2267,1488 2293,1514 2384,1514 v1(2423,1553)
  Top Layer w15: C35.2@1835,1277.5 C30.2@1886,1277.5
  Top Layer w25: FB1.1@2423,1550.91 2482.5,1550.91 C5.2@2485,1553.41 2485,1489.53 C28.1@2470,1474.53 2520,1474.53 2614.69,1379.84 C59.1@2614.69,1315 2627.5,1302.18 C60.1@2627.5,1160 2548.98,1081.48 CK3.2@2548.98,1050 2548.98,1008.52 R48.2@2622.5,935
  Bottom Layer w6: v1@1267.5,1572.5 1272,1568 v1@1269.5,1568
  Bottom Layer w8: v1(2110,1679) 2110,1679.64 2128.36,1698 2239.5,1698 C33.2@2254.5,1683 ; v1@2193,1724 2235.5,1724 C32.2@2254.5,1743
  Bottom Layer w12: 2254.5,1715 2257.43,1712.07 2331,1712.07 2356.54,1686.54 2356.54,1619.46 v1(2423,1553)
  Bottom Layer w15: v1@1267.5,1572.5 v1(1267.5,1760) ; v1@1269.5,1568 1371.5,1466 1801,1466 ; v1@1859,1276 1859,1466 ; v1(1879,1969) 1808,1898 1808,1473 1801,1466 ; v1(2027,1468) 2025,1466 1859,1466 ; C33.2@2254.5,1683 2254.5,1715 C32.2@2254.5,1743 ; 1801,1466 1859,1466
  other v1: 1860,1276
CRS_DV: U1.103 U9.26 | length 1686.4
  Top Layer w6: U1.103@1600.39,1475.35 1600.39,1400.05 1610,1390.44 1610,1390.28 1613.66,1386.63 1613.66,1335.58 1656,1293.24 1656,1066 1648,1058 v1(1646,1058)
  Top Layer w10: v1(712,1376) 731.79,1356.21 U9.26@759.51,1356.21
  Bottom Layer w6: v1(712,1376) 712,1396 745,1429 985.7,1429 986.08,1428.62 996.92,1428.62 1017.92,1407.62 1166.53,1407.62 1229,1345.15 1229,1261.88 1450.88,1040 1628,1040 v1(1646,1058)
DC_DCEN: D2.3 Q4.C R33.2 R37.2 | length 270
  Top Layer w10: R37.2@3383,708.5 3384,709.5 R33.2@3446,709.5 3527.5,709.5 Q4.C@3557,739 3556,740 D2.3@3556,822
DDR_VD18: C6.1 C7.2 C8.2 C9.2 C10.2 C57.1 C58.1 CK2.2 R46.2 U1.11 U1.12 U1.83 U1.84 | length 2742.4
  Top Layer w6: v1@1938,1792 v1(1938,1798)
  Top Layer w8: U1.84@1445.35,1724.88 1545.62,1724.88 v1(1567.5,1703) ; U1.83@1445.35,1740.63 1548.63,1740.63 v1(1568,1760) ; v1(1938,1741) 1938,1732 1976.61,1693.39 U1.11@2054.65,1693.39 ; v1@1938,1792 1938,1777 2005.87,1709.13 U1.12@2054.65,1709.13
  Top Layer w15: v1(1568,1760) 1900,1760 v1(1938,1798)
  Top Layer w25: C57.1@2614.69,1550 2625.47,1560.79 C6.1@2625.47,1715 ; v1(2810,1505) 2810,1390.19 CK2.2@2849.66,1350.53
  Bottom Layer w6: C8.2@1937.5,1742.25 1937.5,1741.5 v1(1938,1741)
  Bottom Layer w15: v1(1567.5,1703) 1568,1703.5 v1(1568,1760) ; v1(1938,1741) v1(1938,1798) 2032.96,1798 2050.96,1780 2478.01,1780 2535.01,1723 v1(2624,1723)
  Bottom Layer w20: v1(2810,1505) 2833.33,1528.33 2950.67,1528.33 3037,1442 3037,1376 v1(3064,1349)
  Bottom Layer w25: C57.1@2614.69,1550 2614.69,1536.32 2665,1486 2791,1486 v1(2810,1505)
DGND: ANT1.2 ANT1.3 BATT.2 C1.1 C2.1 C3.1 C4.1 C5.1 C6.2 C7.1 C8.1 C9.1 C10.1 C11.2 C12.1 C19.1 C20.2 C21.1 C22.1 C23.1 C24.1 C25.1 C26.1 C27.1 C28.2 C29.1 C30.1 C31.1 C32.1 C33.1 C34.1 C35.1 C36.2 C38.2 C39.2 C40.2 C41.1 C45.1 C46.2 C47.2 C48.2 C49.2 C50.2 C51.2 C52.2 C53.2 C54.2 C55.2 C56.2 C57.2 C58.2 C59.2 C60.2 C61.1 C62.2 C63.2 C64.1 C65.1 C66.1 C67.1 C68.2 C69.2 C70.2 C71.1 C72.2 C73.1 C74.1 CB1.2 COM0.1 COM1.1 COM4.1 COM5.1 COM6.1 COM7.1 COM8.1 COM10.1 CT1.1 CT2.2 D3.2 DC.2 DC.3 FB3.1 FB4.2 FS3.1 GPIO.34 I2C0.1 J1.3 Q5.S Q6.E Q7.E R3.2 R4.2 R9.1 R24.1 R25.1 R26.1 R31.1 R33.1 R34.2 R36.1 R41.2 R43.1 R44.1 R45.2 R47.1 R49.1 R51.2 R52.2 R53.2 R54.2 R55.2 R56.2 R57.2 R58.2 R59.2 R60.2 R77.2 R78.2 R79.2 R91.1 RESET.1 RTC_KEY.1 SPI0.1 TP1.1 TP2.1 TP3.1 TP4.1 U1.64 U1.101 U1.128 U2.7 U2.8 U3.2 U4.2 U5.2 U6.2 U7.13 U7.36 U8.4 U9.33 USBH1.4 USBH2.4 Y1.2 Y1.4 Y2.2 Y2.3 Y3.2 Y3.4 | length 38118.5
  Top Layer w8: v1(1381,2159) 1487.65,2159 1505.91,2140.75 U1.64@1505.91,2084.65 ; U1.101@1568.9,1475.35 1568.9,1533.9 v1(1622.5,1587.5) ; U1.128@1994.09,1475.35 1994.09,1441.7 2002.8,1433 2166,1433 v1(2174,1441)
  Top Layer w10: R78.2@1152.5,1232 1126.5,1258 1126.5,1385 R77.2@1152.5,1411 1186,1444.5 1186,1543.5 C34.1@1212.5,1570 ; C62.2@1205,2687.5 1240.7,2651.8 U7.36@1322.76,2651.8 ; U7.13@2120,2651.8 2240.3,2651.8 C63.2@2255,2666.5
  Top Layer w15: C58.2@2810,1562.5 2810,1558 2860.47,1507.53 U5.2@2872.69,1507.53 ; Q6.E@3228,763 3268,723 3331,723 3351,743 3405,743 v1(3443,781)
  Top Layer w20: C36.2@114.68,1565.41 177.63,1565.41 CT1.1@179.68,1567.47 ; RESET.1@168.3,992.12 352,992.12 ; Y3.2@470.69,1203.5 470.69,1244.69 492,1266 C68.2@564,1266 ; v1(562,996) v1@562,997.5 ; R79.2@563.5,1444 565,1442.5 C64.1@565,1385 C73.1@565,1325 C68.2@565,1265 ; Q7.E@865,1844 917.5,1844 R41.2@925,1836.5 R41.2@925,1841.5 ; C45.1@920.5,1903 v1(986.5,1903) ; SPI0.1@951,3040 COM10.1@951,3310 ; C72.2@1000,991.39 C70.2@1145,991.39 ; v1(1135,1775) 1150,1760 C29.1@1212.5,1760 ; C34.1@1212.5,1570 1389.5,1393 1389.5,1248.5 ; C2.1@1511.5,1118 1511.5,960.5 1528,944 ; Y1.4@1584.41,1182.41 1603,1163.81 1603,946 1601,944 ; COM8.1@1613,3040 COM6.1@1613,3310 ; v1(1681,1702) 1860,1702 v1(1867,1709) ; C4.1@1893,2286.5 v1@1923,2286.5 ; v1(1923,2287) 1923,2352 1969,2398 2048,2398 2090.84,2355.16 C11.2@2090.84,2330.5 2092.9,2328.44 C12.1@2092.9,2261.5 ; COM4.1@2117,3040 COM5.1@2117,3310 ; v1(2327,1662) v1@2418.73,1662 ; R3.2@2344.5,1461 2360.87,1461 2406.4,1415.47 v1(2470,1415.47) ; FB4.2@2417.5,1330 2477.5,1330 C19.1@2480,1327.5 C28.2@2480,1405.47 ; v1@2422.5,1654 FB3.1@2422.5,1614.09 2479.33,1614.09 C5.1@2485,1608.41 2523.59,1608.41 2553,1579 2553,1502 2636,1419 2684.53,1419 ; v1(2502,2673) 2622,2673 2716,2767 2716,2942 ; C21.1@2540,1900.81 2607.03,1900.81 C20.2@2610,1903.78 2684.53,1829.25 2684.53,1791 2892,1791 2942.5,1740.5 C47.2@2942.5,1685 ; R31.1@2594,439.5 2627.13,439.5 D3.2@2666.63,479 2737,479 2902.41,313.59 DC.2@3027,313.59 ; COM7.1@2618,3040 COM0.1@2618,3310 ; C60.2@2682.5,1160 2747.5,1160 2790,1117.5 U6.2@2790,1095 ; v1(2684.53,1784.47) C6.2@2684.53,1715 2694.69,1704.84 C57.2@2694.69,1550 2707.19,1562.5 C58.2@2810,1562.5 ; C56.2@2817.5,920 2824.53,912.97 C55.2@2824.53,855 2934.66,744.87 C50.2@2945,744.87 3109.87,744.87 ; U5.2@2872.69,1507.53 3042.5,1507.53 C54.2@3064,1529.03 3139.97,1529.03 C53.2@3145,1534.06 ; R43.1@3107.5,851 3126.6,831.9 U4.2@3126.6,787.11 3126.6,761.6 3109.87,744.87 ; v1(3118,701) 3109.87,709.13 3109.87,744.87 ; I2C0.1@3120,3310 COM1.1@3120,3040 3167.5,3087.5 R52.2@3283,3087.5 R51.2@3347,3087.5 ; Q6.E@3228,763 3232.5,767.5 R36.1@3232.5,821 ; R45.2@3287.5,940 3339,940 v1(3340,939) ; Q5.S@3483,501 3463.5,481.5 R34.2@3463.5,436 3507.5,392 RTC_KEY.1@3546,392
  Top Layer w30: C36.2@114.68,1565.41 72,1522.73 v1(72,1428) 72,1088.41 RESET.1@168.3,992.12 ; TP1.1@155,160 295,300 295,730 335,770 FS3.1@352,770 ; RESET.1@173.68,997.5 445,997.5 ; FS3.1@352,773 FS3.1@355,773 ; FS3.1@355,770 395,810 395,947.5 445,997.5 ; CT2.2@720.53,2720 842,2720 951,2829 SPI0.1@951,3040 ; C65.1@752,997.5 C69.2@630,997.5 562,997.5 445,997.5 ; R41.2@925,1841.5 v1(986.5,1903) ; 954,2930 1203,2930 ; C62.2@1205,2687.5 1203,2689.5 1203,2930 ; USBH2.4@1294.32,516.32 1294.32,819.32 1348.5,873.5 ; C1.1@1430,1248.5 1389.5,1248.5 1348.5,1207.5 1348.5,873.5 ; C41.1@1577,490.94 1712.94,490.94 1760,538 1760,704 ; COM8.1@1613,3040 1613,2954 1589,2930 ; U3.2@1688.2,704 1760,704 ; C30.1@1886,1222.5 C35.1@1829,1222.5 1829,1097 1676,944 1601,944 1528,944 1419,944 1348.5,873.5 ; R4.2@2041,1222.5 2153.17,1110.33 ; J1.3@2098,494 2033,559 2033,887 2016,904 R24.1@1971,904 R25.1@1912.5,904 ; COM4.1@2117,3040 2007,2930 1589,2930 ; R9.1@2206,488.5 2205,489.5 2205,1058.5 2153.17,1110.33 ; C63.2@2255,2666.5 C61.1@2317.29,2666.5 ; v1(2470,1415.47) C28.2@2480,1405.47 ; R31.1@2594,439.5 2537.5,439.5 2468,509 2468,732 USBH1.4@2492,756 2492,801 2561,870 R49.1@2622.5,870 ; COM7.1@2618,3040 2716,2942 3022,2942 3045,2965 ; C60.2@2682.5,1160 2684.53,1162.03 2684.53,1419 C6.2@2684.53,1715 ; v1(2684.53,1784.47) v1@2684.53,1791 ; 2694.69,1253 3082,1253 3131.69,1302.68 R47.1@3131.69,1349.53 ; v1(3059,1703) C48.2@3061,1705 ; COM1.1@3120,3040 3045,2965 ; BATT.2@3210.47,1901 3157.5,1901 R60.2@3050.5,2008 R59.2@3050.5,2065.86 R58.2@3050.5,2123.71 R57.2@3050.5,2181.57 3050.5,2218 ; TP2.1@3520,160 3546,186 RTC_KEY.1@3546,392 ; GPIO.34@3594,1171 3520,1097 3462,1097 3320,1239 3320,2129 3231,2218 3050.5,2218 ; 1203,2930 1589,2930 ; 1760,704 1790,734 1790,876 1818,904 R26.1@1854,904 R25.1@1912.5,904 ; R25.1@1912.5,904 1912.5,1060.17 1962.67,1110.33 2153.17,1110.33 ; 3045,2965 3050.5,2959.5 R53.2@3050.5,2413 R54.2@3050.5,2355.14 R55.2@3050.5,2297.29 R56.2@3050.5,2239.43 3050.5,2218
  Top Layer w40: U2.8@66,2327.45 141.93,2403.39 ANT1.3@141.93,2733.47 ; TP4.1@155,3290 155,2746.53 ANT1.3@141.93,2733.47 ; U2.7@686,2327.45 717.5,2358.95 717.5,2414 ; v1@989,1900.5 989,2367 897,2459 U8.4@815,2459 725.5,2459 CB1.2@717.5,2467 717.5,2414 ; DC.2@3027,313.59 3211,313.59 ; DC.3@3212,439.58 3212,314.59 3211,313.59 ; TP2.1@3520,160 3366.41,313.59 3211,313.59 ; ANT1.3@141.93,2733.47 ANT1.2@258.07,2733.47 258.07,2620.43 323.5,2555 C39.2@323.5,2521 C38.2@323.5,2458 367.5,2414 717.5,2414
  Bottom Layer w8: v1(1622.5,1587.5) C22.1@1622.5,1589
  Bottom Layer w15: Y2.2@1905.28,2454.02 1905.28,2406.72 1923,2389 ; 1940.72,2406.72 Y2.3@1940.72,2454.02 ; v1(2174,1441) 2321,1441 v1(2340,1460) ; C32.1@2309.5,1743 2327.65,1743 2416.65,1654 v1(2421,1654)
  Bottom Layer w20: v1(562,996) 561,995 v1(561,1139) 561,1255 v1(569.5,1263.5) 586,1280 v1@846,1280 ; v1(815,998) 815,1014.9 846,1045.9 v1@846,1280 ; v1(874,997.5) 907,997.5 ; v1(934,998) 933.5,997.5 907,997.5 ; v1(986.5,1903) 1139,1903 ; v1(1135,1775) 1135,1899 1139,1903 ; v1(1381,2159) 1210,2159 1160,2109 1160,1924 1139,1903 ; v1(1496.69,1246.5) 1533.5,1246.5 v1(1591,1189) ; C22.1@1622.5,1589 1625,1591.5 C9.1@1625,1703 ; C9.1@1622.5,1703 C9.1@1625,1703 ; v1(1681,1702) 1680,1703 C9.1@1625,1703 ; v1(1867,1709) 1882.5,1709 C8.1@1882.5,1742.25 1880,1744.75 C31.1@1880,1917.5 ; v1(1923,2287) 1923,2389 ; C33.1@2309.5,1683 2309.5,1679.5 v1(2327,1662) ; v1(2470,1415.47) 2655.53,1415.47 2694.69,1376.32 C59.2@2694.69,1315 ; v1(2502,2673) 2500,2671 v1(2327,2671) 2205,2671 1940.72,2406.72 1923,2389 ; v1(3108,852) 3159,903 v1(3159,985) 3186,1012 C49.2@3186,1134 ; v1(3118,701) 3212,607 DC.3@3212,439.58 ; v1(3340,939) 3440,939 ; RTC_KEY.1@3546,392 3446,492 v1(3446,654.5) 3446,933 3440,939 ; GPIO.34@3594,1171 3594,1006 3527,939 3440,939 ; v1@846,1280 v1(852,1286) 907,1231 907,997.5 ; C9.1@1625,1703 C26.1@1625,1917.5 1677,1969.5 1677,2143 1923,2389
  Bottom Layer w30: v1(72,1428) 72,2350 v1(115,2393) ; TP4.1@155,3290 253,3388 917,3388 951,3354 COM10.1@951,3310 ; v1(934,998) 1195,998 1294.32,898.68 USBH2.4@1294.32,516.32 ; COM5.1@2117,3310 2117,3354 2148,3385 2591,3385 2618,3358 COM0.1@2618,3310 ; v1(2204,937) 2377,937 2492,822 USBH1.4@2492,756 2510,756 2549,717 2549,648.47 C40.2@2502.53,602 ; v1(2684.53,1784.47) 2977.53,1784.47 v1(3059,1703) 3260,1703 v1(3323,1640)
  Bottom Layer w40: I2C0.1@3120,3310 3500,3310 TP3.1@3520,3290
  other v1: 1070,997.5
  other v2: 166,83 3531,83 120,91 3485,91 213,105 3578,105 91,112 3456,112 231,142 3596,142 78,150 3443,150 230,185 3595,185 81,188 3446,188 102,220 212,220 3467,220 3577,220 173,237 3538,237 132,240 3497,240 166,3213 3531,3213 120,3221 3485,3221 213,3235 3578,3235 91,3242 3456,3242 231,3272 3596,3272 78,3280 3443,3280 230,3315 3595,3315 81,3318 3446,3318 102,3350 212,3350 3467,3350 3577,3350 173,3367 3538,3367 132,3370 3497,3370
EN12: C46.1 R39.2 U6.1 | length 162
  Top Layer w10: C46.1@2812.5,1160 2802.5,1160 2827.4,1135.1 U6.1@2827.4,1095 ; R39.2@2865,1160 R39.2@2875,1150
  Top Layer w15: C46.1@2812.5,1160 2865,1160 R39.2@2875,1160
EN18: C47.1 R40.2 U5.1 | length 146.2
  Top Layer w10: U5.1@2872.69,1544.93 2887.5,1559.74 R40.2@2887.5,1620 C47.1@2887.5,1685
FXEN: R79.1 U1.102 U9.28 | length 1865.3
  Top Layer w6: v1(618.5,1440.62) R79.1@618.5,1444 ; U1.102@1584.65,1475.35 1584.65,1398.67 1601.66,1381.66 1601.66,1330.61 1644,1288.27 1644,1110 v1(1634,1100)
  Top Layer w10: v1(618.5,1440.62) 654.12,1405 654.12,1365.88 703.16,1316.84 U9.28@759.51,1316.84
  Bottom Layer w6: v1(618.5,1440.62) 627.5,1449.62 1035.32,1449.62 1036.93,1448 1160.09,1448 1253,1355.09 1253,1271.82 1460.82,1064 1598,1064 v1(1634,1100)
I2C0_SCL: I2C0.2 U1.3 | length 2598.2
  Top Layer w6: U1.3@2054.65,1567.4 2098,1567.4 2101.4,1564 2190.7,1564 2242,1615.3 2242,1669.97 2274.03,1702 2460.03,1702 2491,1732.97 2491,2538 v1(2517,2564)
  Bottom Layer w6: v1(2517,2564) 2523,2558 2584,2558 2703,2677 2888.97,2677 3158,2946.03 3158,3193 I2C0.2@3041,3310
I2C0_SDA: I2C0.3 U1.2 | length 2543.7
  Top Layer w6: U1.2@2054.65,1551.65 2195.32,1551.65 2254,1610.33 2254,1665 2279,1690 2465,1690 2503,1728 2503,2515 v1(2568,2580)
  Bottom Layer w6: v1(2568,2580) 2677,2689 2884,2689 3079,2884 3079,3182 2962,3299 I2C0.3@2962,3310
IO_VD33: C19.2 C20.1 C21.2 C22.2 C23.2 C24.2 C25.2 C26.2 C27.2 C37.1 C43.2 C48.1 C49.1 C52.1 C61.2 C62.1 C63.1 C70.1 C71.2 CB1.1 CK1.2 COM0.4 COM1.4 COM4.4 COM5.4 COM6.6 COM7.4 COM8.6 COM10.6 CT2.1 D4.1 FB2.2 FB6.1 GPIO.1 GPIO.2 I2C0.4 PW1.1 Q1.S R5.2 R6.2 R7.2 R38.1 R39.1 R40.1 R42.1 R50.1 R64.1 R67.2 R68.2 R69.2 R74.2 R75.2 R76.2 R80.2 R82.2 R83.2 R84.2 R85.1 R86.1 R88.2 SPI0.6 U1.9 U1.24 U1.57 U1.81 U1.85 U1.98 U3.3 U7.12 U7.37 U8.8 U9.14 | length 21787.8
  Top Layer w6: U1.98@1521.65,1475.35 1521.65,1511.65 1573,1563 1573,1585 v1(1569,1589)
  Top Layer w8: U1.85@1445.35,1709.13 1504.37,1709.13 v1(1567.5,1646) ; U1.81@1445.35,1772.13 1524.13,1772.13 v1(1570,1818) ; v1(1616,1975) 1616.14,1974.86 U1.57@1616.14,2084.65 ; v1(1937.5,1685.5) 1961.11,1661.89 U1.9@2054.65,1661.89 ; v1(1937.5,1856) 1988,1856 2010,1878 2010,1890 2018.11,1898.11 U1.24@2054.65,1898.11
  Top Layer w10: C62.1@1205,2632.5 1205.39,2632.11 U7.37@1322.76,2632.11
  Top Layer w12: U9.14@948.49,1336.53 1031.53,1336.53 v1(1034,1339) ; U7.12@2120,2632.11 2234.39,2632.11 C63.1@2255,2611.5 ; C49.1@3107.5,1119 C49.1@3119,1107.5 ; C43.2@3230.5,881 3260.5,911 3260.5,977.5 3258,980 3246.5,980
  Top Layer w15: R88.2@562.5,1502 562.5,1610 565,1612.5 ; CT2.1@661.47,2720 662.5,2718.97 662.5,2670 ; CB1.1@662.5,2467 662.5,2670 ; R76.2@697,1612.5 735,1612.5 ; R38.1@735.5,1704 735.5,1613 735,1612.5 ; R83.2@811.67,1612.5 R74.2@754.33,1612.5 735,1612.5 ; C71.2@1070,1052.5 C70.1@1147.06,1052.5 ; U8.8@1115,2609 1138.5,2632.5 1172.5,2632.5 ; C70.1@1145,1050.44 C70.1@1147.06,1052.5 ; R84.2@1152.5,1290 1152.5,1340 1175,1340 1192.5,1322.5 1192.5,1192.5 1175,1175 R75.2@1152.5,1175 FB6.1@1152.5,1112 1152.5,1057.94 C70.1@1147.06,1052.5 ; C62.1@1205,2632.5 1172.5,2632.5 ; R86.1@1281,1052.5 R85.1@1220,1052.5 C70.1@1147.06,1052.5 ; v1(1570,1818) 1571,1819 1689.86,1819 ; 1692,1819 1900.5,1819 v1(1937.5,1856) ; C63.1@2255,2611.5 C61.2@2321.32,2611.47 2314.5,2604.66 R50.1@2314.5,2550 ; 662.5,2670 1135,2670 1172.5,2632.5
  Top Layer w20: R82.2@150,462.5 182,462.5 ; v1(184,349) 182,351 182,462.5 ; R7.2@215,462.5 182,462.5 ; Q1.S@335.68,1640 363.18,1612.5 R5.2@395.68,1612.5 565,1612.5 R76.2@697,1612.5 ; COM10.6@557,3310 SPI0.6@557,3040 557,2824.47 CT2.1@661.47,2720 ; COM8.6@1219,3040 COM6.6@1219,3310 1219,3385 1222,3388 ; COM4.4@1880,3040 COM5.4@1880,3310 1880,3387 1881,3388 ; 2380,3388 2381,3387 COM0.4@2381,3310 COM7.4@2381,3040 ; FB2.2@2417.5,1270 2477.5,1270 C19.2@2480,1272.5 ; 2858,3388 2883,3363 I2C0.4@2883,3310 COM1.4@2883,3040 ; R39.1@2930,1160 3080,1160 C49.1@3106,1134 ; GPIO.1@3494,2771 GPIO.2@3594,2771
  Top Layer w25: R64.1@2312.5,2734 2316.5,2738 2381,2738 ; C61.2@2321.32,2611.47 2322.8,2612.95 2379,2612.95 ; COM7.4@2381,3040 2381,2738 ; v1(2540,1955.81) 2547.03,1962.83 C20.1@2610,1962.83 2803.17,1962.83 2991,1775 3000,1775 ; 2762,1973 2762,2567 2716.05,2612.95 2379,2612.95 ; R40.1@2942.5,1620 3003,1620 ; D4.1@3138,1776 3137,1775 3000,1775 ; PW1.1@3438.92,847 3438.92,886.08 3345,980 3246.5,980 3119,1107.5 3119,1134 C49.1@3106,1134 3106,1150 3149.5,1193.5 3190.5,1193.5 3229,1232 3229,1565 3174,1620 3003,1620 ; 2379,2612.95 2381,2614.95 2381,2738 ; 3000,1775 3000,1623 3003,1620
  Top Layer w30: COM10.6@557,3310 557,3355 590,3388 1222,3388 1881,3388 2380,3388 2858,3388 3284,3388 3354,3318 3354,3217 3494,3077 GPIO.1@3494,2771 ; CK1.2@2975,997.02 2988.02,984 C52.1@3107.5,984 ; R42.1@3107.5,917 C52.1@3107.5,984 ; C49.1@3107.5,1119 C52.1@3107.5,984
  Bottom Layer w10: v1(1567.5,1646) 1595,1673.5 ; v1(1569,1589) 1595,1615
  Bottom Layer w12: 1593,1820 1593,1812 1595,1810 ; 1595,1615 1595,1673.5 1595,1810 ; v1(1616,1975) 1595,1954 1595,1810 ; v1(1937.5,1685.5) 1910.5,1712.5 1910.5,1829 v1(1937.5,1856)
  Bottom Layer w15: v1(1570,1818) 1591,1818 1593,1820 ; v1(1937.5,1856) 1937.5,1925.5 1986,1974 2521.81,1974 v1(2540,1955.81)
  Bottom Layer w20: v1(184,349) 448,85 1515,85 1578,148 1578,495 1529,544 1529,623 1566,660 v1(1640,660) ; v1(562,1499) 560,1497 560,1431 652,1339 1003,1339 ; v1(1034,1339) 1003,1339 ; v1(1253,1052) 1087,1052 1041,1098 1041,1195 1003,1233 1003,1339 ; 1269,1054 1640,683 v1(1640,660) ; v1(2447,1271) 2447,1166 2444,1163 ; C49.1@3106,1134 3077,1163 2444,1163 ; v1(1640,660) 1640,576 1798,418 2141,418 2175,452 2175,745 2130,790 2078,790 v1(2070,798) 2070,1041 2192,1163 2444,1163
LED0N: R74.1 RJ45.10 U9.24 | length 1909.2
  Top Layer w8: U9.24@785.1,1401.49 785.1,1420
  Top Layer w10: v1(754.33,1557.5) 785.1,1526.73 785.1,1420
  Bottom Layer w8: RJ45.10@624,250 568,306 444,306 390,360 390,1385.2 539.8,1535 731.83,1535 v1(754.33,1557.5)
LED1N: R76.1 RJ45.11 U9.25 | length 2323.1
  Top Layer w10: v1(697,1557.5) 697,1427 748.1,1375.9 U9.25@759.51,1375.9
  Bottom Layer w8: v1(697,1557.5) 542.5,1557.5 376,1391 376,314 495,195 890.87,195 RJ45.11@945.87,250